# Altium PCB ADE_short.PcbDoc
Units mm, origin at the board's own origin, x right, y up, seen from the top; angles counter-clockwise.
Board outline 152.4 x 101.6 mm, 2 copper layers (Top Layer, Bottom Layer); 12 components, 20 nets, 160 pads, 0 vias.
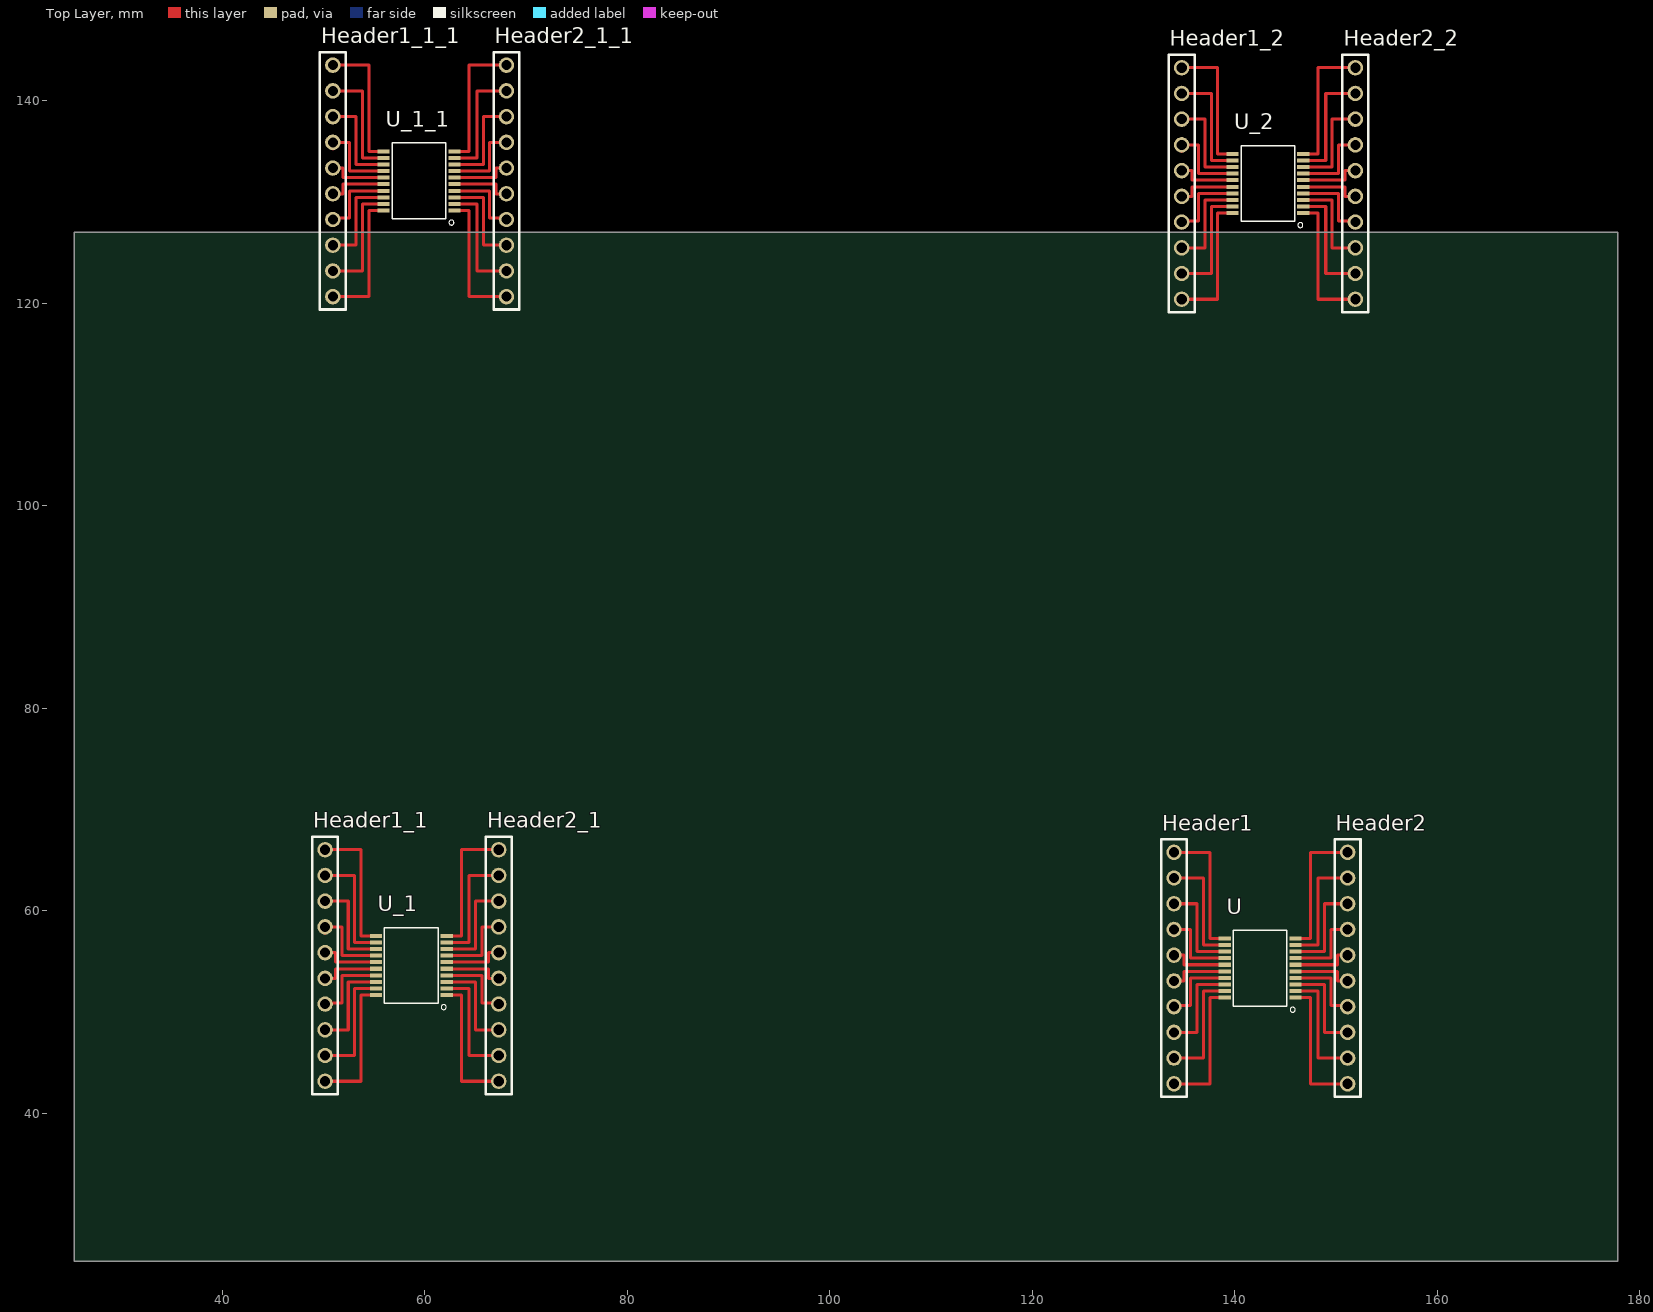
[diagram p0: Top Layer view]
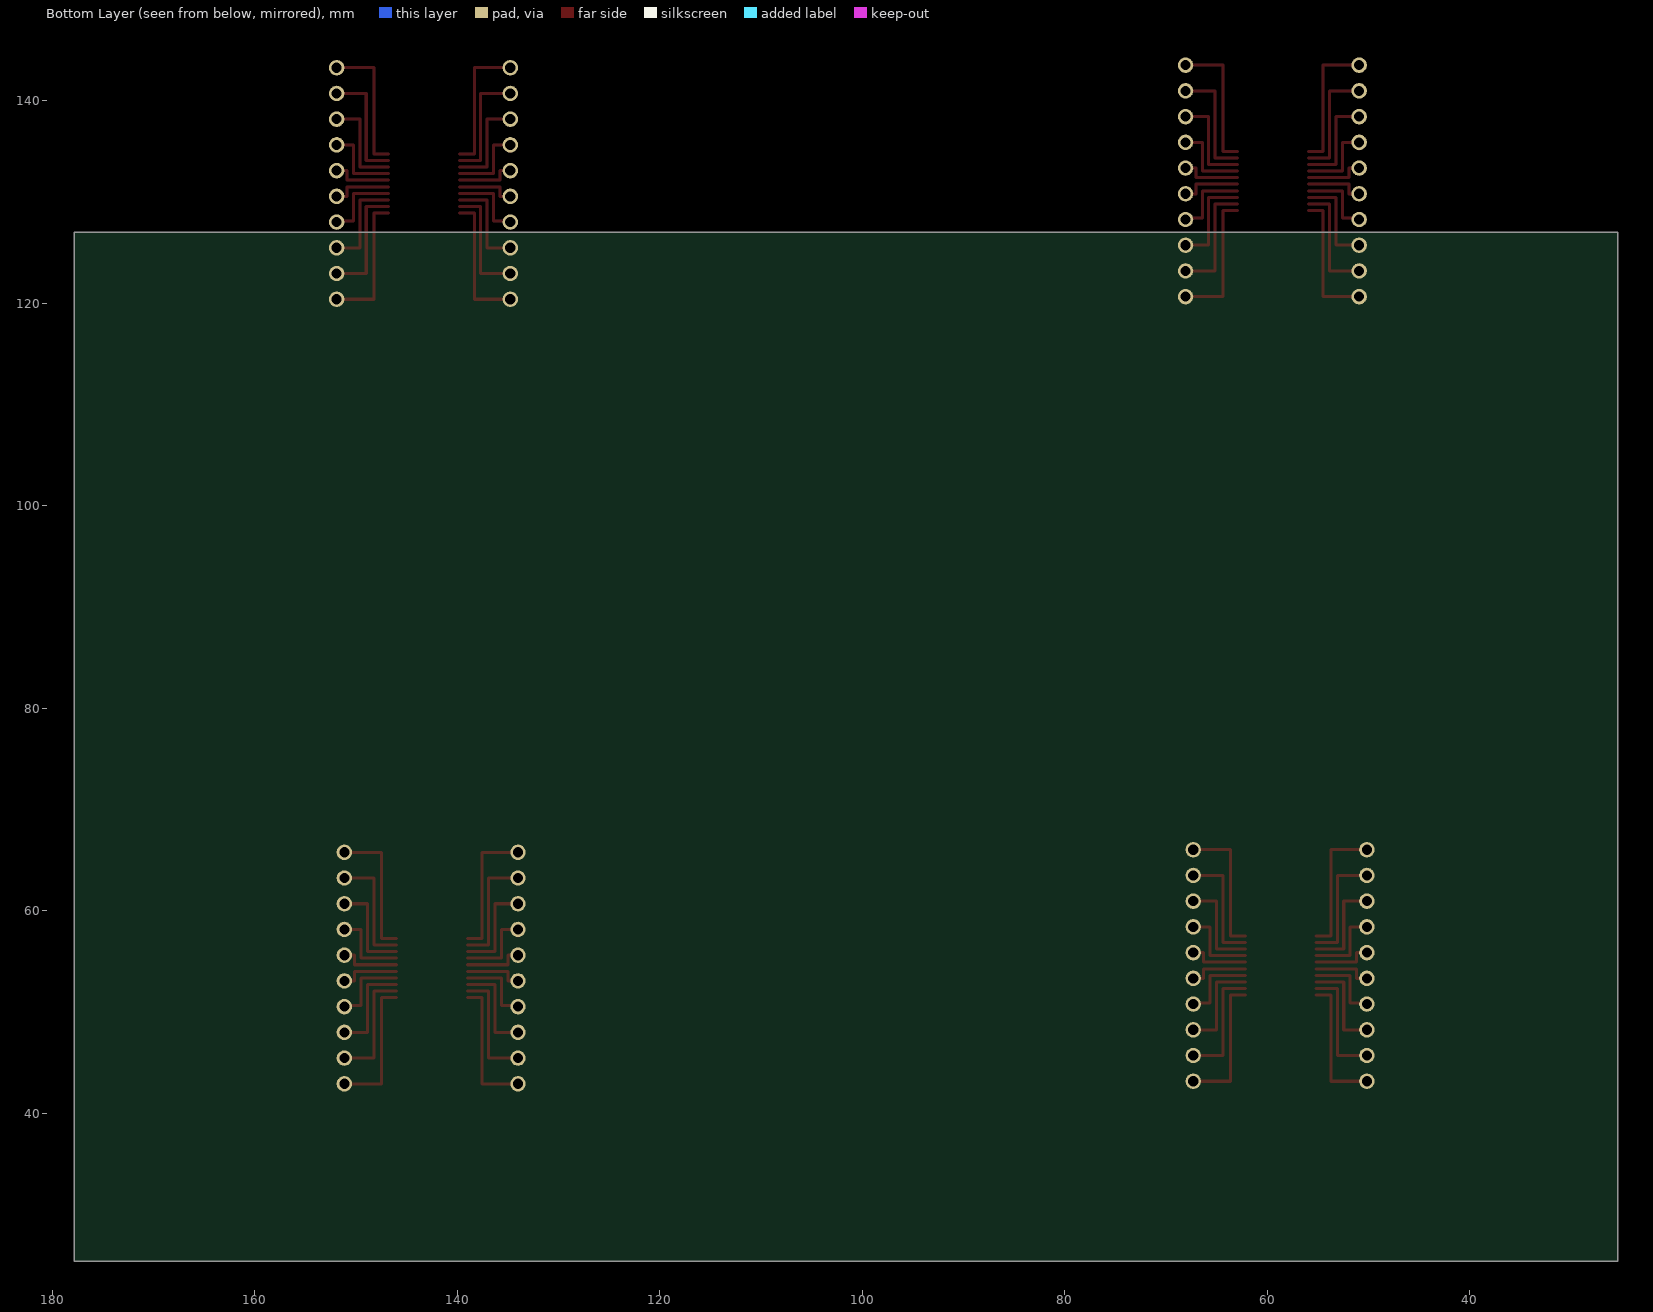
[diagram p1: Bottom Layer view, seen from below]

## Layer stack, top to bottom
Top Solder: solder mask 0.0102, Solder Resist, Dk 3.5
Top Layer: signal copper 0.0356
Dielectric 1: dielectric 0.32, FR-4, Dk 4.8
Bottom Layer: signal copper 0.0356
Bottom Solder: solder mask 0.0102, Solder Resist, Dk 3.5

## Board outline
25.4,25.4 177.8,25.4 177.8,127 25.4,127

## Design rules (kind name [scope] priority, off if disabled: settings)
Clearance [All] p1: gap=0.1 ignorepadtopadclearanceinfootprint=FALSE
PolygonConnect [All] p1: connectstyle=Relief reliefconductorwidth=0.254 reliefentries=4 polygonreliefangle="90 Angle" airgapwidth=0.254
RoutingVias [All] p1: holewidth=0.711 width=1.27 viastyle="Through Hole" minholewidth=0.711 minwidth=1.27 maxholewidth=0.711 maxwidth=1.27
SolderMaskExpansion [All] p1: expansion=0.102
Width [All] p1: maxlimit=1 minlimit=0.254 preferedwidth=0.3
30 further rules are at their usual default settings.

## Classes and differential pairs
component class ADE_short: Header1 Header2 U

## Components (designator, comment, footprint, x,y, rotation, side; value= is the part's Value field where it differs from the comment)
Header1 "MaleHeaderPin" Headerx10 133.985,54.356 r90 top
Header1_1 "MaleHeaderPin" Headerx10 50.165,54.61 r90 top (schematic designator Header1)
Header1_1_1 "MaleHeaderPin" Headerx10 50.927,132.08 r90 top (schematic designator Header1)
Header1_2 "MaleHeaderPin" Headerx10 134.747,131.826 r90 top (schematic designator Header1)
Header2 "MaleHeaderPin" Headerx10 151.13,54.356 r90 top
Header2_1 "MaleHeaderPin" Headerx10 67.31,54.61 r90 top (schematic designator Header2)
Header2_1_1 "MaleHeaderPin" Headerx10 68.072,132.08 r90 top (schematic designator Header2)
Header2_2 "MaleHeaderPin" Headerx10 151.892,131.826 r90 top (schematic designator Header2)
U "ADE7753" SSOP-20 142.494,54.356 r180 top
U_1 "ADE7753" SSOP-20 58.674,54.61 r180 top (schematic designator U)
U_1_1 "ADE7753" SSOP-20 59.436,132.08 r180 top (schematic designator U)
U_2 "ADE7753" SSOP-20 143.256,131.826 r180 top (schematic designator U)

## Footprints (in the part's own frame and the unit in brackets; to place one, negate y for a bottom-side part, rotate by r counter-clockwise, add the part's x,y. Pads: shape width x height; smd on the part's side, far side on the other; paste and mask are expansions set on the pad)
Headerx10 [mil]
  round 60 hole 39.37 mask+3.94: 1(-450,0) 2(-350,0) 3(-250,0) 4(-150,0) 5(-50,0) 6(50,0) 7(150,0) 8(250,0) 9(350,0) 10(450,0)
  silkscreen extent -500,-50 500,50
SSOP-20 [mm]
  rect 1.2x0.4 smd: 1(-3.5,2.925) 2(-3.5,2.275) 3(-3.5,1.625) 4(-3.5,0.975) 5(-3.5,0.325) 6(-3.5,-0.325) 7(-3.5,-0.975) 8(-3.5,-1.625) 9(-3.5,-2.275) 10(-3.5,-2.925) 11(3.5,-2.925) 12(3.5,-2.275) 13(3.5,-1.625) 14(3.5,-0.975) 15(3.5,-0.325) 16(3.5,0.325) 17(3.5,0.975) 18(3.5,1.625) 19(3.5,2.275) 20(3.5,2.925)
  silkscreen extent -3.46,-3.75 2.65,4.36

## Part data
U U_1 U_1_1 U_2: "IC ENERGY METERING 1PHASE 20SSOP", Package="SSOP-20 Analog Devices", Digi-Key_Part_Number=ADE7753ARSZRLCT-ND, MF="Analog Devices", MP=ADE7753, SnapEDA_Link=https://www.snapeda.com/parts/ADE7753/Analog%20Devices%20Inc./view-part/3209960/?ref=snap

## Nets (pads, with @x,y where several pads share a name; then routed paths per layer and width w, separated by ;. In a path a pad name is that pad's centre, name@x,y a point inside that pad or via, vN(x,y) a via of type N, cw(c..) or ccw(c..) an arc to the next point about the centre after c; other vN are vias at no path point)
NetHeader1_1: Header1.1 U.20 | length 13.5
  Top Layer w0.3: Header1.1 137.541,42.926 137.541,51.431 U.20
NetHeader1_2: Header1.2 U.19 | length 11.6
  Top Layer w0.3: Header1.2 136.906,45.466 136.906,52.081 U.19
NetHeader1_3: Header1.3 U.18 | length 9.7
  Top Layer w0.3: Header1.3 136.271,48.006 136.271,52.731 U.18
NetHeader1_4: Header1.4 U.17 | length 7.8
  Top Layer w0.3: Header1.4 133.985,50.673 135.635,50.673 135.635,53.381 U.17
NetHeader1_5: Header1.5 U.16 | length 6
  Top Layer w0.3: Header1.5 134.997,53.086 134.997,54.031 U.16
NetHeader1_6: Header1.6 U.15 | length 6
  Top Layer w0.3: Header1.6 134.997,55.626 134.997,54.681 U.15
NetHeader1_7: Header1.7 U.14 | length 8.7
  Top Layer w0.3: Header1.7 133.985,57.531 134.62,58.166 135.635,58.166 135.635,55.331 U.14
NetHeader1_8: Header1.8 U.13 | length 9.7
  Top Layer w0.3: Header1.8 136.271,60.706 136.271,55.981 U.13
NetHeader1_9: Header1.9 U.12 | length 11.6
  Top Layer w0.3: Header1.9 136.906,63.246 136.906,56.631 U.12
NetHeader1_10: Header1.10 U.11 | length 13.5
  Top Layer w0.3: Header1.10 137.541,65.786 137.541,57.281 U.11
NetHeader2_1: Header2.1 U.1 | length 13.6
  Top Layer w0.3: U.1 147.447,51.431 147.447,42.926 Header2.1
NetHeader2_2: Header2.2 U.2 | length 11.8
  Top Layer w0.3: U.2 148.209,52.081 148.209,45.466 Header2.2
NetHeader2_3: Header2.3 U.3 | length 9.9
  Top Layer w0.3: U.3 148.844,52.731 148.844,48.006 Header2.3
NetHeader2_4: Header2.4 U.4 | length 8.5
  Top Layer w0.3: U.4 149.479,53.381 149.479,50.673 150.749,50.673 151.13,51.054 Header2.4
NetHeader2_5: Header2.5 U.5 | length 6.1
  Top Layer w0.3: U.5 150.114,54.031 150.114,53.086 Header2.5
NetHeader2_6: Header2.6 U.6 | length 6.1
  Top Layer w0.3: U.6 150.114,54.681 150.114,55.626 Header2.6
NetHeader2_7: Header2.7 U.7 | length 8
  Top Layer w0.3: U.7 149.479,55.331 149.479,58.166 Header2.7
NetHeader2_8: Header2.8 U.8 | length 9.9
  Top Layer w0.3: U.8 148.844,55.981 148.844,60.706 Header2.8
NetHeader2_9: Header2.9 U.9 | length 11.8
  Top Layer w0.3: U.9 148.209,56.631 148.209,63.246 Header2.9
NetHeader2_10: Header2.10 U.10 | length 13.6
  Top Layer w0.3: U.10 147.447,57.281 147.447,65.786 Header2.10
pads on no net: Header1_1.1 Header1_1.2 Header1_1.3 Header1_1.4 Header1_1.5 Header1_1.6 Header1_1.7 Header1_1.8 Header1_1.9 Header1_1.10 Header1_1_1.1 Header1_1_1.2 Header1_1_1.3 Header1_1_1.4 Header1_1_1.5 Header1_1_1.6 Header1_1_1.7 Header1_1_1.8 Header1_1_1.9 Header1_1_1.10 Header1_2.1 Header1_2.2 Header1_2.3 Header1_2.4 Header1_2.5 Header1_2.6 Header1_2.7 Header1_2.8 Header1_2.9 Header1_2.10 Header2_1.1 Header2_1.2 Header2_1.3 Header2_1.4 Header2_1.5 Header2_1.6 Header2_1.7 Header2_1.8 Header2_1.9 Header2_1.10 Header2_1_1.1 Header2_1_1.2 Header2_1_1.3 Header2_1_1.4 Header2_1_1.5 Header2_1_1.6 Header2_1_1.7 Header2_1_1.8 Header2_1_1.9 Header2_1_1.10 Header2_2.1 Header2_2.2 Header2_2.3 Header2_2.4 Header2_2.5 Header2_2.6 Header2_2.7 Header2_2.8 Header2_2.9 Header2_2.10 U_1.1 U_1.2 U_1.3 U_1.4 U_1.5 U_1.6 U_1.7 U_1.8 U_1.9 U_1.10 U_1.11 U_1.12 U_1.13 U_1.14 U_1.15 U_1.16 U_1.17 U_1.18 U_1.19 U_1.20 U_1_1.1 U_1_1.2 U_1_1.3 U_1_1.4 U_1_1.5 U_1_1.6 U_1_1.7 U_1_1.8 U_1_1.9 U_1_1.10 U_1_1.11 U_1_1.12 U_1_1.13 U_1_1.14 U_1_1.15 U_1_1.16 U_1_1.17 U_1_1.18 U_1_1.19 U_1_1.20 U_2.1 U_2.2 U_2.3 U_2.4 U_2.5 U_2.6 U_2.7 U_2.8 U_2.9 U_2.10 U_2.11 U_2.12 U_2.13 U_2.14 U_2.15 U_2.16 U_2.17 U_2.18 U_2.19 U_2.20
copper on no net: | length 592.2
  Top Layer w0.3: 50.165,43.18 53.721,43.18 53.721,51.685 55.174,51.685 ; 50.165,45.72 53.086,45.72 53.086,52.335 55.174,52.335 ; 50.165,48.26 52.451,48.26 52.451,52.985 55.174,52.985 ; 50.165,50.8 50.165,50.927 51.815,50.927 51.815,53.635 55.174,53.635 ; 50.165,53.34 51.177,53.34 51.177,54.285 55.174,54.285 ; 50.165,55.88 51.177,55.88 51.177,54.935 55.174,54.935 ; 50.165,58.42 50.165,57.785 50.8,58.42 51.815,58.42 51.815,55.585 55.174,55.585 ; 50.165,60.96 52.451,60.96 52.451,56.235 55.174,56.235 ; 50.165,63.5 53.086,63.5 53.086,56.885 55.174,56.885 ; 50.165,66.04 53.721,66.04 53.721,57.535 55.174,57.535 ; 50.927,120.65 54.483,120.65 54.483,129.155 55.936,129.155 ; 50.927,123.19 53.848,123.19 53.848,129.805 55.936,129.805 ; 50.927,125.73 53.213,125.73 53.213,130.455 55.936,130.455 ; 50.927,128.27 50.927,128.397 52.577,128.397 52.577,131.105 55.936,131.105 ; 50.927,130.81 51.939,130.81 51.939,131.755 55.936,131.755 ; 50.927,133.35 51.939,133.35 51.939,132.405 55.936,132.405 ; 50.927,135.89 50.927,135.255 51.562,135.89 52.577,135.89 52.577,133.055 55.936,133.055 ; 50.927,138.43 53.213,138.43 53.213,133.705 55.936,133.705 ; 50.927,140.97 53.848,140.97 53.848,134.355 55.936,134.355 ; 50.927,143.51 54.483,143.51 54.483,135.005 55.936,135.005 ; 62.174,51.685 63.627,51.685 63.627,43.18 67.31,43.18 ; 62.174,52.335 64.389,52.335 64.389,45.72 67.31,45.72 ; 62.174,52.985 65.024,52.985 65.024,48.26 67.31,48.26 ; 62.174,53.635 65.659,53.635 65.659,50.927 66.929,50.927 67.31,51.308 67.31,50.8 ; 62.174,54.285 66.294,54.285 66.294,53.34 67.31,53.34 ; 62.174,54.935 66.294,54.935 66.294,55.88 67.31,55.88 ; 62.174,55.585 65.659,55.585 65.659,58.42 67.31,58.42 ; 62.174,56.235 65.024,56.235 65.024,60.96 67.31,60.96 ; 62.174,56.885 64.389,56.885 64.389,63.5 67.31,63.5 ; 62.174,57.535 63.627,57.535 63.627,66.04 67.31,66.04 ; 62.936,129.155 64.389,129.155 64.389,120.65 68.072,120.65 ; 62.936,129.805 65.151,129.805 65.151,123.19 68.072,123.19 ; 62.936,130.455 65.786,130.455 65.786,125.73 68.072,125.73 ; 62.936,131.105 66.421,131.105 66.421,128.397 67.691,128.397 68.072,128.778 68.072,128.27 ; 62.936,131.755 67.056,131.755 67.056,130.81 68.072,130.81 ; 62.936,132.405 67.056,132.405 67.056,133.35 68.072,133.35 ; 62.936,133.055 66.421,133.055 66.421,135.89 68.072,135.89 ; 62.936,133.705 65.786,133.705 65.786,138.43 68.072,138.43 ; 62.936,134.355 65.151,134.355 65.151,140.97 68.072,140.97 ; 62.936,135.005 64.389,135.005 64.389,143.51 68.072,143.51 ; 134.747,120.396 138.303,120.396 138.303,128.901 139.756,128.901 ; 134.747,122.936 137.668,122.936 137.668,129.551 139.756,129.551 ; 134.747,125.476 137.033,125.476 137.033,130.201 139.756,130.201 ; 134.747,128.016 134.747,128.143 136.397,128.143 136.397,130.851 139.756,130.851 ; 134.747,130.556 135.759,130.556 135.759,131.501 139.756,131.501 ; 134.747,133.096 135.759,133.096 135.759,132.151 139.756,132.151 ; 134.747,135.636 134.747,135.001 135.382,135.636 136.397,135.636 136.397,132.801 139.756,132.801 ; 134.747,138.176 137.033,138.176 137.033,133.451 139.756,133.451 ; 134.747,140.716 137.668,140.716 137.668,134.101 139.756,134.101 ; 134.747,143.256 138.303,143.256 138.303,134.751 139.756,134.751 ; 146.756,128.901 148.209,128.901 148.209,120.396 151.892,120.396 ; 146.756,129.551 148.971,129.551 148.971,122.936 151.892,122.936 ; 146.756,130.201 149.606,130.201 149.606,125.476 151.892,125.476 ; 146.756,130.851 150.241,130.851 150.241,128.143 151.511,128.143 151.892,128.524 151.892,128.016 ; 146.756,131.501 150.876,131.501 150.876,130.556 151.892,130.556 ; 146.756,132.151 150.876,132.151 150.876,133.096 151.892,133.096 ; 146.756,132.801 150.241,132.801 150.241,135.636 151.892,135.636 ; 146.756,133.451 149.606,133.451 149.606,138.176 151.892,138.176 ; 146.756,134.101 148.971,134.101 148.971,140.716 151.892,140.716 ; 146.756,134.751 148.209,134.751 148.209,143.256 151.892,143.256